# EAGLE board Cassiopeia2 (EAGLE 9.6.2)
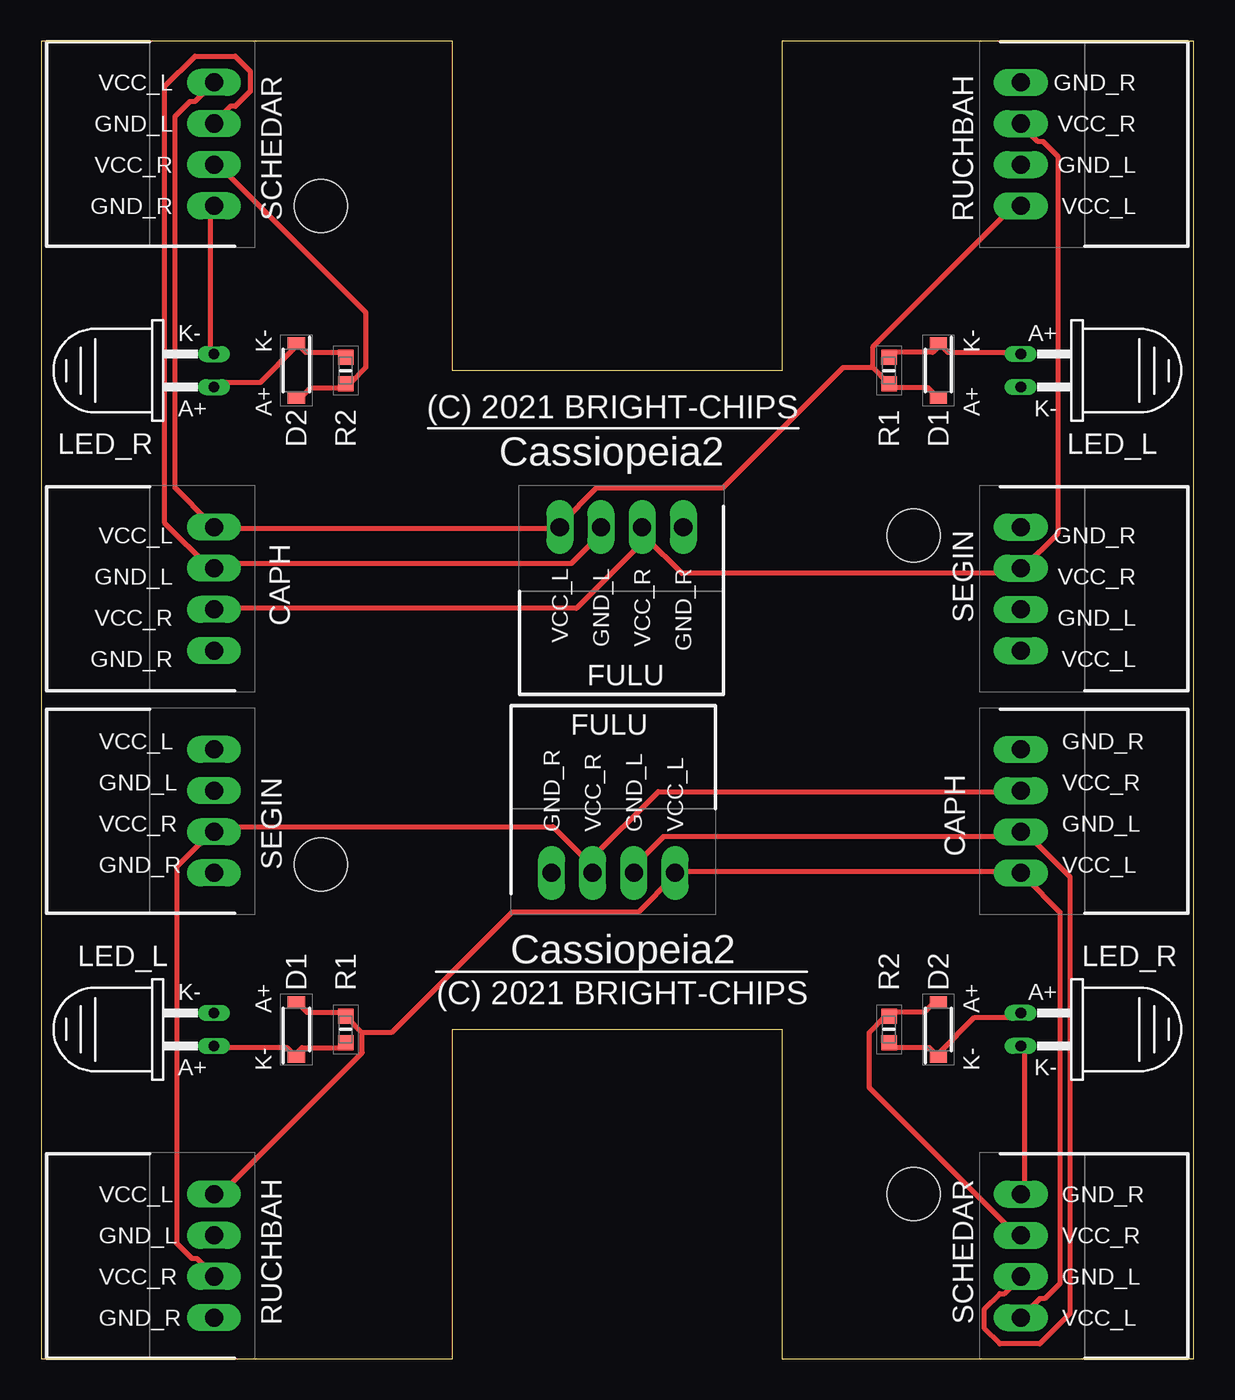
[diagram p0: board, top side]
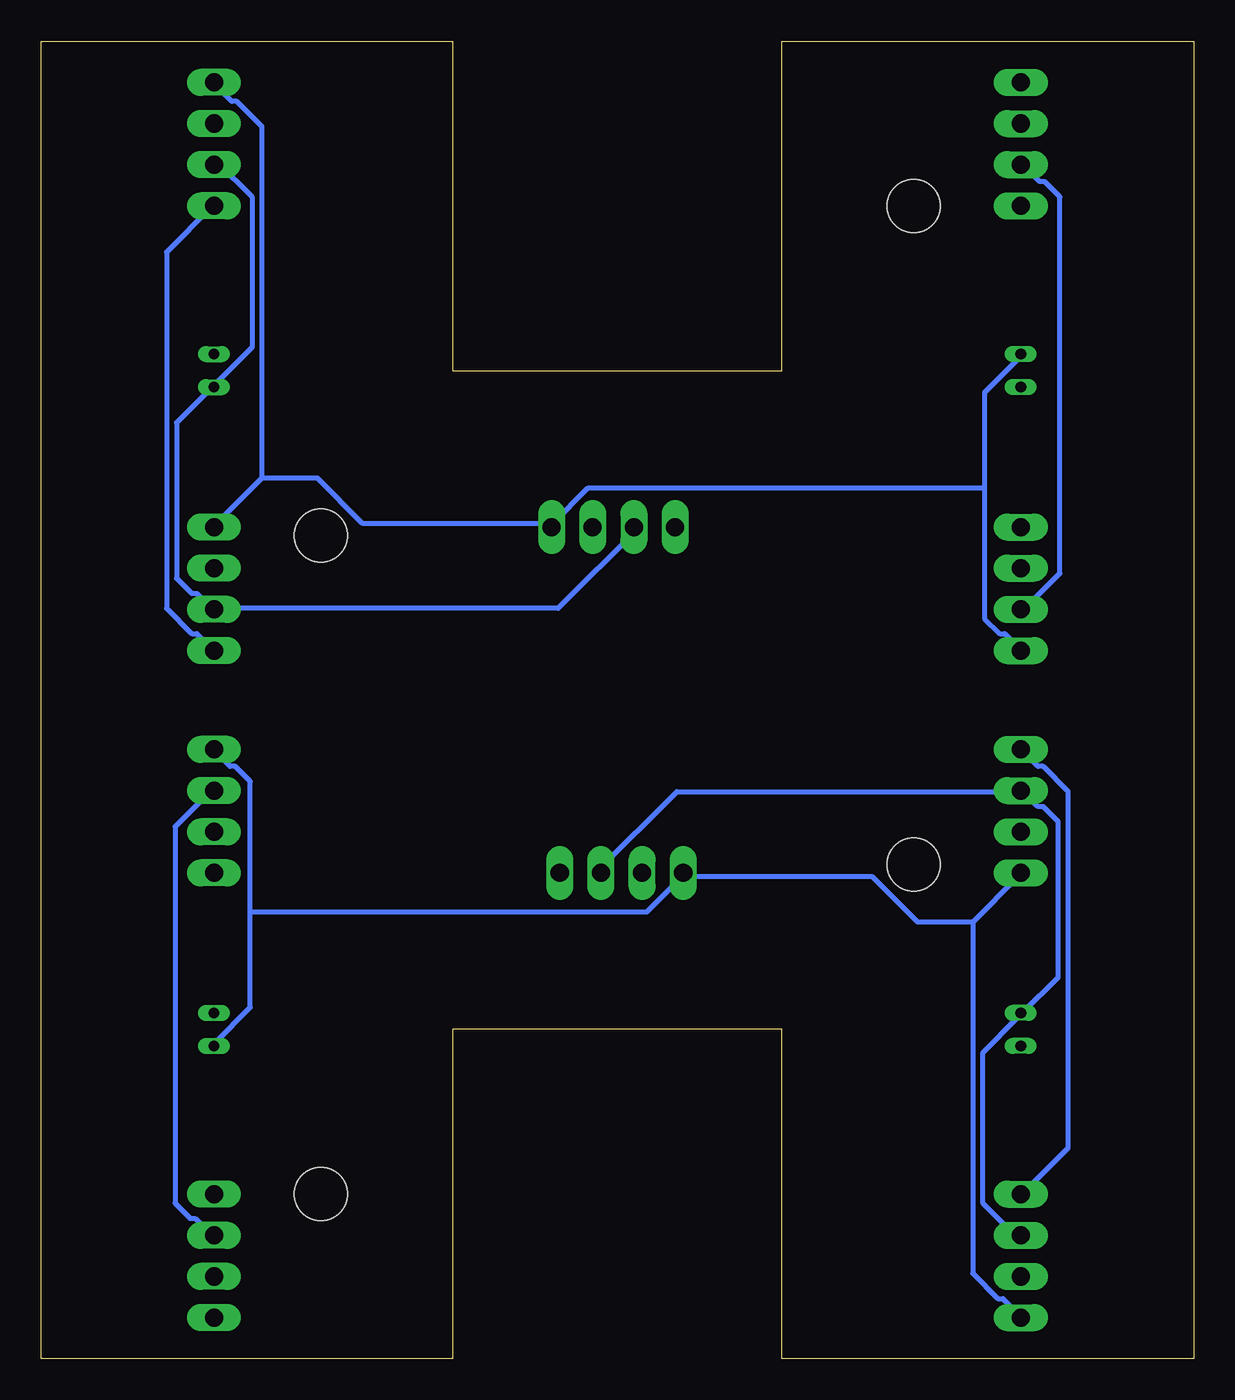
[diagram p1: board, bottom side, seen from below]

Size 70 x 80 mm. Coordinates in mm from the lower left corner, seen from the top.
Outline: 0,80 0,0 25,0 25,20 45,20 45,0 70,0 70,80 45,80 45,60 25,60 25,80 0,80
Copper layers (1*16): Top 0.035mm / dielectric 1.6mm / Bottom 0.035mm
Design rules "Elecrow_2-layer_PCB_eagle_rule": minimum track width 6mil, minimum drill 12mil, track to track 6mil, track to pad 6mil, pad to pad 6mil, via to via 8mil, smd to smd 0mil, copper to edge 20mil, drill to drill 10mil, minimum pad ring 6mil, minimum via ring 6mil, stop-mask expansion 0mil, vias tented up to drill 100mil, thermal gap 10mil
Holes 3.21 mm at 53,10 17,30 17,70 53,50
vRestrict: 1 lines

## Footprints (pad centres in the part's own frame; a part is rotated, then mirrored left to right if it is on the bottom)
SAPD_4PIN = drill 1.1 pad 1.65 long: 1 0,0; 2 2.5,0; 3 5,0; 4 7.5,0
SODFL3516X70N = smd 0.74 x 1.04: 1 -1.65,0; 2 1.65,0
LED_FOOT = drill 0.65 long: A 0,0; K 0,2
RESC1608X55N = smd 0.9 x 0.95: 1 -0.8,0; 2 0.8,0

## Placement (x,y rotation side)
CAPH  SPAD_4PIN  [SAPD_4PIN]  59.5,37 270 top
CAPH1  SPAD_4PIN  [SAPD_4PIN]  10.5,43 90 top
D1  S-183T  [SODFL3516X70N]  15.5,20 90 top
D2  S-183T  [SODFL3516X70N]  54.5,20 90 top
D3  S-183T  [SODFL3516X70N]  54.5,60 270 top
D4  S-183T  [SODFL3516X70N]  15.5,60 270 top
FULU  SPAD_4PIN  [SAPD_4PIN]  31,29.5 0 top
FULU1  SPAD_4PIN  [SAPD_4PIN]  39,50.5 180 top
LED_L  [LED_FOOT]  10.5,19 0 top
LED_L1  [LED_FOOT]  59.5,61 180 top
LED_R  [LED_FOOT]  59.5,21 180 top
LED_R1  [LED_FOOT]  10.5,59 0 top
R1  RK73B1JTTD103J  [RESC1608X55N]  18.5,20 90 top
R2  RK73B1JTTD103J  [RESC1608X55N]  51.5,20 270 top
R3  RK73B1JTTD103J  [RESC1608X55N]  51.5,60 270 top
R4  RK73B1JTTD103J  [RESC1608X55N]  18.5,60 90 top
RUCHBAH  SPAD_4PIN  [SAPD_4PIN]  10.5,2.5 90 top
RUCHBAH1  SPAD_4PIN  [SAPD_4PIN]  59.5,77.5 270 top
SCHEDAR  SPAD_4PIN  [SAPD_4PIN]  59.5,10 270 top
SCHEDAR1  SPAD_4PIN  [SAPD_4PIN]  10.5,70 90 top
SEGIN  SPAD_4PIN  [SAPD_4PIN]  10.5,29.5 90 top
SEGIN1  SPAD_4PIN  [SAPD_4PIN]  59.5,50.5 270 top

## Library data of the parts
CAPH CAPH1 FULU FULU1 RUCHBAH RUCHBAH1 SCHEDAR SCHEDAR1 SEGIN SEGIN1 = LED_base; DESCRIPTION: XH-2.5mm Header side entry 4 way JST XH Series, Series Number S4B, 2.5mm Pitch 4 Way 1 Row Right Angle PCB Header, Solder Termination, 3A; HEIGHT: 7mm; MANUFACTURER_NAME: JST (JAPAN SOLDERLESS TERMINALS); MANUFACTURER_PART_NUMBER: S4B-XH-A(LF)(SN)
D1-D4 = S-183T; DESCRIPTION: SEMITEC S-183T Constant Current Diode, 20mA, 4.6V max, 2-Pin SMD; HEIGHT: 0.7mm; MANUFACTURER_NAME: Semitec; MANUFACTURER_PART_NUMBER: S-183T; MOUSER_PART_NUMBER: 954-S-183T; MOUSER_PRICE-STOCK: https://www.mouser.com/Search/Refine.aspx?Keyword=954-S-183T
LED_L LED_L1 LED_R LED_R1 = LED_base
R1-R4 = RK73B1JTTD103J; DESCRIPTION: Thick Film Resistors - SMD 1/10watts 10Kohms 5%; HEIGHT: 0.55mm; MANUFACTURER_NAME: KOA Speer; MANUFACTURER_PART_NUMBER: RK73B1JTTD103J; MOUSER_PART_NUMBER: 660-RK73B1JTTD103J; MOUSER_PRICE-STOCK: https://www.mouser.co.uk/ProductDetail/KOA-Speer/RK73B1JTTD103J?qs=hmtrJ2UjXcBKRTcwO9LloQ%3D%3D

## Nets
GND_L: CAPH.3 FULU.3 LED_L.K RUCHBAH.3 SCHEDAR.3 SEGIN.3
GND_L1: CAPH1.3 FULU1.3 LED_L1.K RUCHBAH1.3 SCHEDAR1.3 SEGIN1.3
GND_R: CAPH.1 FULU.1 LED_R.K RUCHBAH.1 SCHEDAR.1 SEGIN.1
GND_R1: CAPH1.1 FULU1.1 LED_R1.K RUCHBAH1.1 SCHEDAR1.1 SEGIN1.1
N$1: D2.1 LED_R.A R2.2
N$2: D1.1 LED_L.A R1.1
N$3: D4.1 LED_R1.A R4.2
N$4: D3.1 LED_L1.A R3.1
VCC_L: CAPH.4 D1.2 FULU.4 R1.2 RUCHBAH.4 SCHEDAR.4 SEGIN.4
VCC_L1: CAPH1.4 D3.2 FULU1.4 R3.2 RUCHBAH1.4 SCHEDAR1.4 SEGIN1.4
VCC_R: CAPH.2 D2.2 FULU.2 R2.1 RUCHBAH.2 SCHEDAR.2 SEGIN.2
VCC_R1: CAPH1.2 D4.2 FULU1.2 R4.1 RUCHBAH1.2 SCHEDAR1.2 SEGIN1.2

## Tracks (layer width: path | path; a pad name or v marks a point on that pad's centre or on a via)
GND_L
  Top 0.305: SCHEDAR.3 59.44,4.88 58.52,3.96 58.22,3.96 57.3,3.05 57.3,1.83 58.22,0.91 60.66,0.91 62.48,2.74 62.48,29.26 59.74,32 CAPH.3 59.44,31.7 37.8,31.7 36.27,30.18 36.27,29.57 FULU.3
  Bottom 0.305: RUCHBAH.3 10.67,7.32 12.8,9.45 12.8,18.59 10.67,20.73 LED_L.K 10.36,21.03 8.23,23.16 8.23,32.61 9.14,33.53 9.45,33.53 10.36,34.44 SEGIN.3 10.67,34.44 31.39,34.44 36.27,29.57 FULU.3
GND_L1
  Top 0.305: SCHEDAR1.3 10.56,75.12 11.48,76.04 11.78,76.04 12.7,76.95 12.7,78.17 11.78,79.09 9.35,79.09 7.52,77.26 7.52,50.74 10.26,48 CAPH1.3 10.56,48.3 32.2,48.3 33.73,49.83 33.73,50.43 FULU1.3
  Bottom 0.305: RUCHBAH1.3 59.33,72.69 57.2,70.55 57.2,61.41 59.33,59.27 LED_L1.K 59.64,58.97 61.77,56.84 61.77,47.39 60.86,46.47 60.55,46.47 59.64,45.56 SEGIN1.3 59.33,45.56 38.61,45.56 33.73,50.43 FULU1.3
GND_R
  Top 0.305: LED_R.K 59.74,18.9 59.74,10.06 SCHEDAR.1
  Bottom 0.305: 57.3,27.13 57.3,21.34 59.44,19.2 LED_R.K | 57.3,27.13 57.3,35.05 58.22,35.97 58.52,35.97 59.44,36.88 CAPH.1 | 13.41,26.52 13.41,5.18 11.89,3.66 11.58,3.66 10.67,2.74 RUCHBAH.1 | 13.41,26.52 10.67,29.26 SEGIN.1 | 13.41,26.52 16.76,26.52 19.51,29.26 30.79,29.26 FULU.1 31.09,29.26 33.22,27.13 57.3,27.13
GND_R1
  Top 0.305: LED_R1.K 10.26,61.1 10.26,69.94 SCHEDAR1.1
  Bottom 0.305: 12.7,52.87 12.7,58.66 10.56,60.8 LED_R1.K | 12.7,52.87 12.7,44.95 11.78,44.03 11.48,44.03 10.56,43.12 CAPH1.1 | 56.59,53.48 56.59,74.82 58.11,76.34 58.42,76.34 59.33,77.26 RUCHBAH1.1 | 56.59,53.48 59.33,50.74 SEGIN1.1 | 56.59,53.48 53.24,53.48 50.49,50.74 39.22,50.74 FULU1.1 38.91,50.74 36.78,52.87 12.7,52.87
N$1
  Top 0.305: R2.2 51.51,18.9 53.95,18.9 54.25,18.59 D2.1 54.56,18.59 56.69,20.73 59.44,20.73 LED_R.A
N$2
  Top 0.305: R1.1 18.29,18.9 15.85,18.9 15.54,18.59 D1.1 15.24,18.59 14.94,18.9 10.67,18.9 LED_L.A
N$3
  Top 0.305: R4.2 18.49,61.1 16.05,61.1 15.75,61.41 D4.1 15.44,61.41 13.31,59.27 10.56,59.27 LED_R1.A
N$4
  Top 0.305: R3.1 51.71,61.1 54.15,61.1 54.45,61.41 D3.1 54.76,61.41 55.06,61.1 59.33,61.1 LED_L1.A
VCC_L
  Top 0.305: D1.2 15.54,21.64 16.15,21.03 18.29,21.03 R1.2 18.59,20.73 19.51,19.81 | 19.51,19.81 19.51,18.59 10.67,9.75 RUCHBAH.4 | SCHEDAR.4 59.74,2.74 60.66,3.66 60.96,3.66 61.87,4.57 61.87,27.13 59.74,29.26 CAPH.4 59.44,29.57 38.71,29.57 FULU.4 38.41,29.26 36.27,27.13 28.59,27.13 21.27,19.81 19.51,19.81
  Bottom 0.305: SEGIN.4 10.36,36.88 9.45,35.97 9.14,35.97 7.62,34.44 7.62,12.8 10.36,10.06 RUCHBAH.4
VCC_L1
  Top 0.305: D3.2 54.45,58.36 53.85,58.97 51.71,58.97 R3.2 51.41,59.27 50.49,60.19 | 50.49,60.19 50.49,61.41 59.33,70.25 RUCHBAH1.4 | SCHEDAR1.4 10.26,77.26 9.35,76.34 9.04,76.34 8.13,75.43 8.13,52.87 10.26,50.74 CAPH1.4 10.56,50.43 31.29,50.43 FULU1.4 31.59,50.74 33.73,52.87 41.41,52.87 48.73,60.19 50.49,60.19
  Bottom 0.305: SEGIN1.4 59.64,43.12 60.55,44.03 60.86,44.03 62.38,45.56 62.38,67.2 59.64,69.94 RUCHBAH1.4
VCC_R
  Top 0.305: D2.2 54.25,21.64 53.65,21.03 51.51,21.03 R2.1 51.21,20.73 50.29,19.81 50.29,16.46 59.44,7.32 SCHEDAR.2 | RUCHBAH.2 10.36,5.18 9.45,6.1 9.14,6.1 8.23,7.01 8.23,29.87 10.36,32 SEGIN.2 10.67,32 10.97,32.31 31.09,32.31 33.22,30.18 | 33.22,30.18 33.22,29.57 FULU.2 33.22,30.18 | 33.22,30.18 37.49,34.44 59.44,34.44 CAPH.2
  Bottom 0.305: SCHEDAR.2 59.74,7.62 60.66,8.53 60.96,8.53 61.87,9.45 61.87,32.31 59.74,34.44 CAPH.2
VCC_R1
  Top 0.305: D4.2 15.75,58.36 16.36,58.97 18.49,58.97 R4.1 18.79,59.27 19.71,60.19 19.71,63.54 10.56,72.69 SCHEDAR1.2 | RUCHBAH1.2 59.64,74.82 60.55,73.9 60.86,73.9 61.77,72.99 61.77,50.13 59.64,48 SEGIN1.2 59.33,48 59.03,47.69 38.91,47.69 36.78,49.83 | 36.78,49.83 36.78,50.43 FULU1.2 36.78,49.83 | 36.78,49.83 32.51,45.56 10.56,45.56 CAPH1.2
  Bottom 0.305: SCHEDAR1.2 10.26,72.38 9.35,71.47 9.04,71.47 8.13,70.55 8.13,47.69 10.26,45.56 CAPH1.2

## Text on the board
tNames: VCC_L | GND_R | GND_L | VCC_R | VCC_R | GND_L | GND_R | VCC_L | K- | K- | A+ | A+ | (C) 2021 BRIGHT-CHIPS | Cassiopeia2 | VCC_L | GND_R | GND_L | VCC_L | GND_L | VCC_R | GND_R | VCC_R | VCC_R | GND_L | GND_R | VCC_L | VCC_L | GND_R | GND_L | VCC_R | VCC_R | GND_R | VCC_R | GND_L | VCC_L | GND_L | GND_R | VCC_L | Cassiopeia2 | (C) 2021 BRIGHT-CHIPS | A+ | A+ | K- | K- | VCC_L | GND_R | GND_L | VCC_R | VCC_R | GND_L | GND_R | VCC_L
vRestrict: V-cut | V-cut
_tNames: SCHEDAR | RUCHBAH | LED_R | D2 | R2 | R1 | D1 | LED_L | CAPH | SEGIN | FULU | FULU | SEGIN | CAPH | LED_L | D1 | R1 | R2 | D2 | LED_R | RUCHBAH | SCHEDAR